# Altium PCB PCB1.PcbDoc
Units mm, origin at the board's own origin, x right, y up, seen from the top; angles counter-clockwise.
Board outline 90.25 x 90.21 mm, 2 copper layers (Top Layer, Bottom Layer); 9 components, 86 nets, 163 pads, 37 vias.
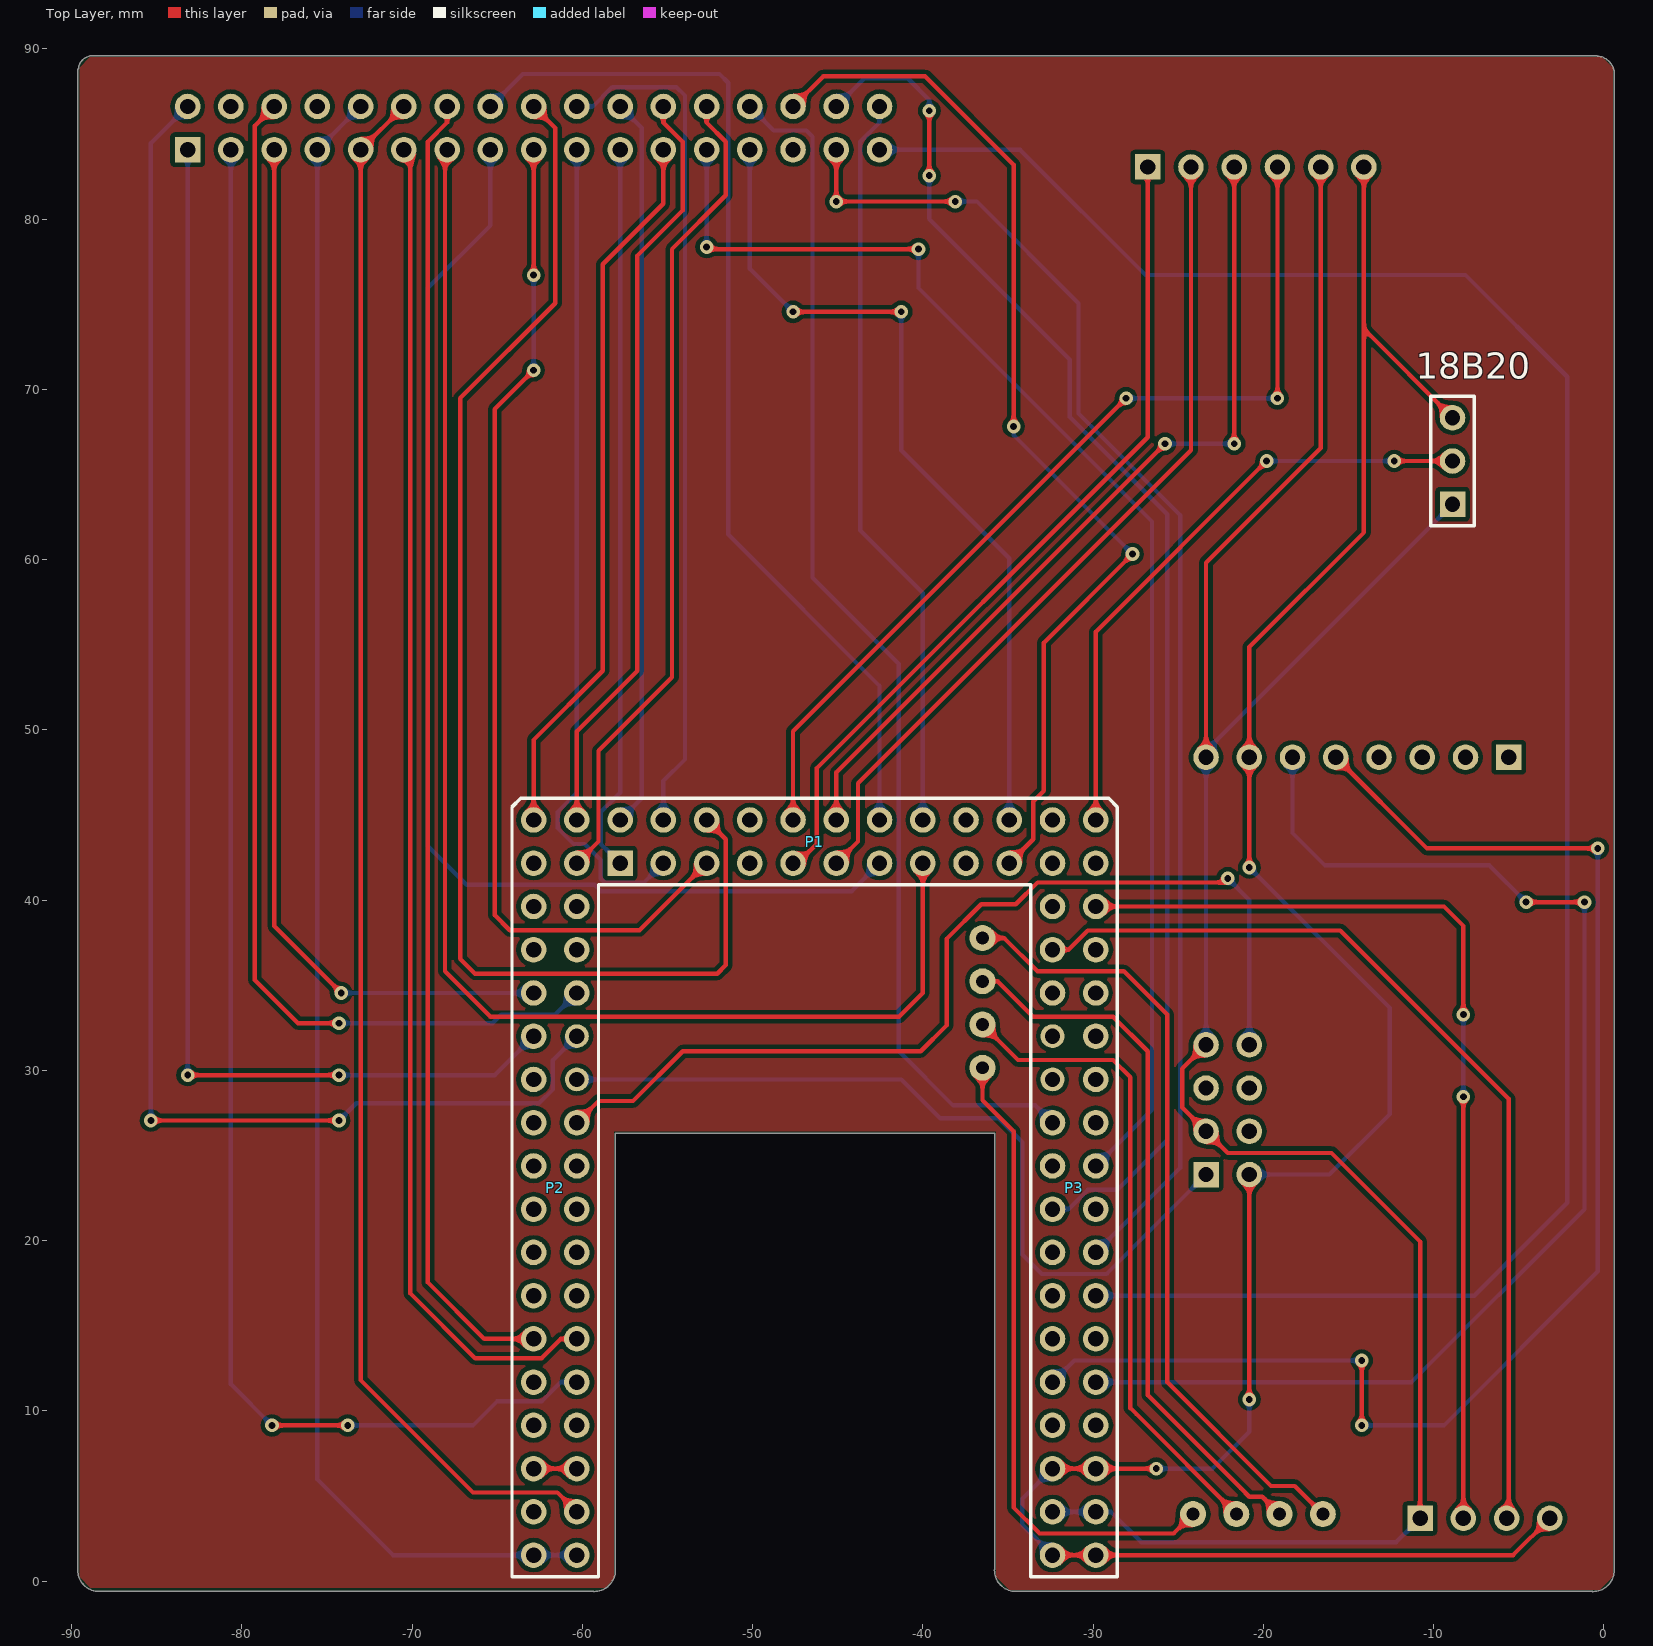
[diagram p0: Top Layer view]
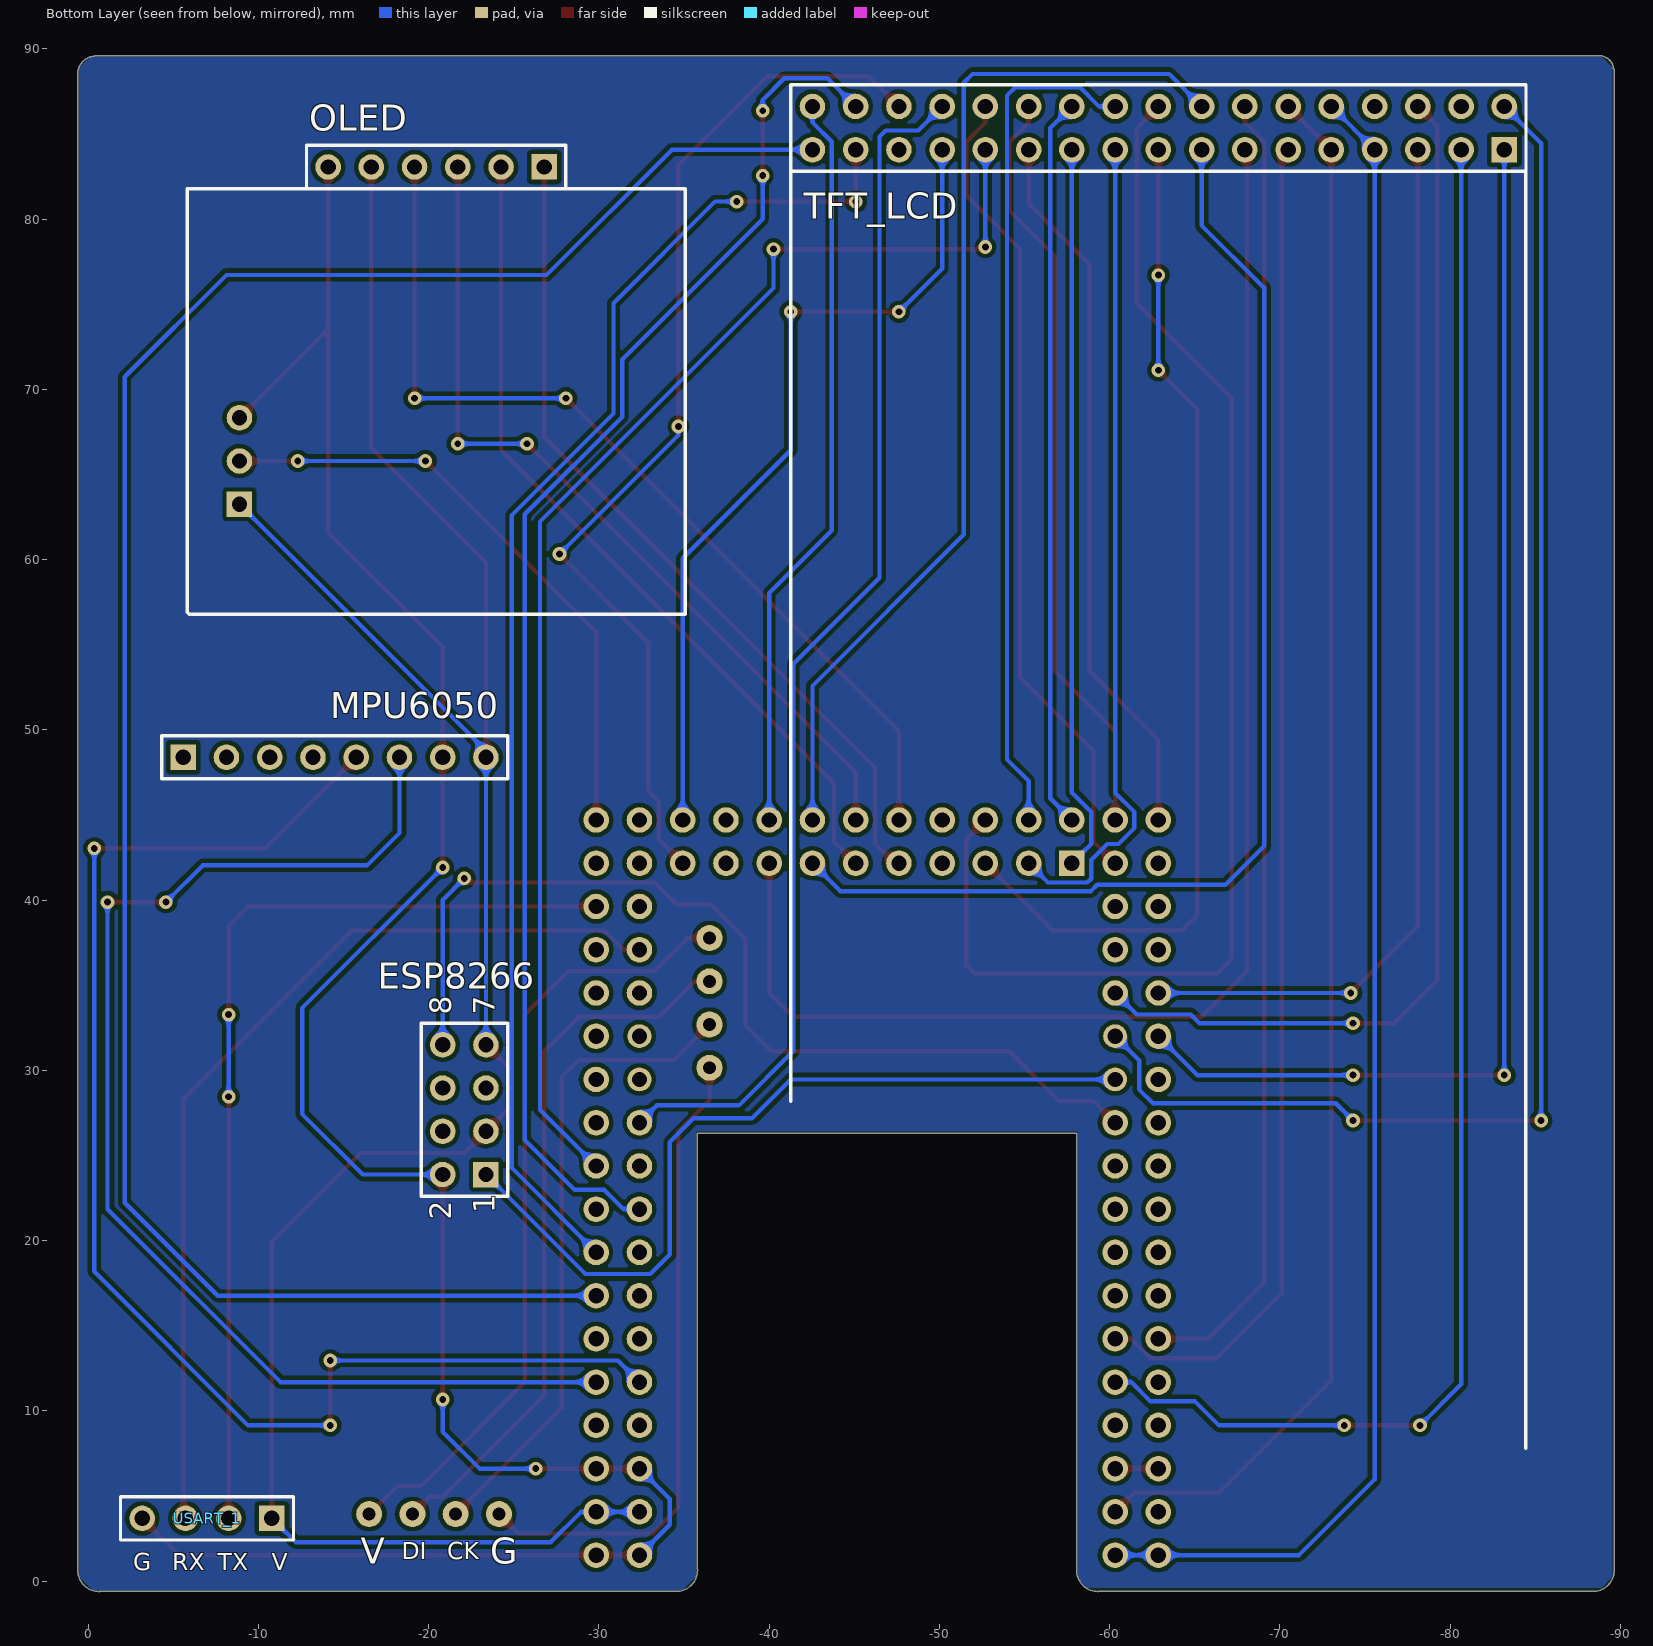
[diagram p1: Bottom Layer view, seen from below]

## Layer stack, top to bottom
Top Solder: solder mask 0.0102, Solder Resist, Dk 3.5
Top Layer: signal copper 0.0356
Dielectric 1: dielectric 0.32, FR-4, Dk 4.8
Bottom Layer: signal copper 0.0356
Bottom Solder: solder mask 0.0102, Solder Resist, Dk 3.5

## Board outline
-88.392,-0.61 -59.353,-0.61 ccw(c-59.316,-0.515) -59.316,-0.617 ccw(c-59.316,0.635) -58.064,0.63 ccw(c-58.166,0.635) -58.064,0.635 -58.064,26.314 -35.789,26.314 -35.789,0.679 ccw(c-35.694,0.642) -35.796,0.642 ccw(c-34.544,0.642) -34.549,-0.61 ccw(c-34.544,-0.508) -34.544,-0.61 -0.679,-0.61 ccw(c-0.642,-0.515) -0.642,-0.617 ccw(c-0.642,0.635) 0.61,0.63 ccw(c0.508,0.635) 0.61,0.635 0.61,88.519 ccw(c0.508,88.519) 0.61,88.524 ccw(c-0.444,88.519) -0.38,89.571 ccw(c-0.444,89.492) -0.444,89.594 -88.767,89.594 ccw(c-88.767,89.492) -88.772,89.594 ccw(c-88.767,88.762) -89.596,88.844 ccw(c-89.535,88.762) -89.637,88.762 -89.637,0.679 ccw(c-89.542,0.642) -89.644,0.642 ccw(c-88.392,0.642) -88.397,-0.61 ccw(c-88.392,-0.508)

## Design rules (kind name [scope] priority, off if disabled: settings)
Clearance Clearance_1 [All] p1: gap=0.254 ignorepadtopadclearanceinfootprint=FALSE except(0: Arc-Hole Track-Hole SMDPad-Hole THPad-Hole Via-Hole Fill-Hole Poly-Hole Region-Hole Text-Hole)
Clearance [All] p2: gap=0.254 ignorepadtopadclearanceinfootprint=FALSE except(0: Arc-Hole Track-Hole SMDPad-Hole THPad-Hole Via-Hole Fill-Hole Poly-Hole Region-Hole Text-Hole)
ComponentClearance [All] p1 off: gap=0.254 collisioncheckmode=3 verticalgap=0.254 showdistances=FALSE
PlaneClearance [All] p1: clearance=0.254
PolygonConnect [All] p1: connectstyle=Relief reliefconductorwidth=0.254 reliefentries=4 polygonreliefangle="90 Angle" airgapwidth=0.254
RoutingVias [All] p1: holewidth=0.4 width=0.8 viastyle="Through Hole" minholewidth=0.4 minwidth=0.8 maxholewidth=0.4 maxwidth=0.8
SolderMaskExpansion [All] p1: expansion=0.102 istentingtop=FALSE
Width [All] p1: maxlimit=0.254 minlimit=0.254 preferedwidth=0.254
28 further rules are at their usual default settings.

## Components (designator, comment, footprint, x,y, rotation, side; value= is the part's Value field where it differs from the comment)
18B20 "Header 3" HDR1X3 -8.89,63.246 r90 top
ESP8266 "Header 4X2" HDR2X4 -23.368,23.876 r90 bottom
MPU6050 "Header 8" HDR1X8 -5.588,48.387 r180 bottom
OLED "Header 6" HDR1X6 -26.797,83.058 r0 bottom
P1 "Header 10X2" HDR2X10 -46.355,43.434 r0 top
P2 "Header 18X2" HDR2X18#1 -61.595,23.114 r270 top
P3 "Header 18X2" HDR2X18#2 -31.115,23.114 r270 top
TFT_LCD "Header 17X2" HDR2X17 -83.185,84.074 r0 bottom
USART_1 "Header 4" HDR1X4 -10.795,3.683 r0 bottom

## Footprints (in the part's own frame and the unit in brackets; to place one, negate y for a bottom-side part, rotate by r counter-clockwise, add the part's x,y. Pads: shape width x height; smd on the part's side, far side on the other; paste and mask are expansions set on the pad)
HDR1X3 [mm] "Connector; Header; 3 Position"
  rect 1.5x1.5 hole 0.9: 1(0,0)
  round 1.5 hole 0.9: 2(2.54,0) 3(5.08,0)
  silkscreen extent -1.27,-1.27 6.35,1.27
HDR1X4 [mm] "Connector; Header; 4 Position"
  rect 1.5x1.5 hole 0.9: 1(0,0)
  round 1.5 hole 0.9: 2(2.54,0) 3(5.08,0) 4(7.62,0)
  silkscreen extent -1.27,-1.27 8.89,1.27
HDR1X6 [mm] "Connector; Header; 6 Position"
  rect 1.5x1.5 hole 0.9: 1(0,0)
  round 1.5 hole 0.9: 2(2.54,0) 3(5.08,0) 4(7.62,0) 5(10.16,0) 6(12.7,0)
  silkscreen extent -1.27,-1.27 13.97,1.27
HDR1X8 [mm] "Connector; Header; 8 Position"
  rect 1.5x1.5 hole 0.9: 1(0,0)
  round 1.5 hole 0.9: 2(2.54,0) 3(5.08,0) 4(7.62,0) 5(10.16,0) 6(12.7,0) 7(15.24,0) 8(17.78,0)
  silkscreen extent -1.27,-1.27 19.05,1.27
HDR2X4 [mm] "Connector; Header; 4x2 Position"
  rect 1.5x1.5 hole 0.9: 1(0,0)
  round 1.5 hole 0.9: 2(0,2.54) 3(2.54,0) 4(2.54,2.54) 5(5.08,0) 6(5.08,2.54) 7(7.62,0) 8(7.62,2.54)
  silkscreen extent -1.27,-1.27 8.89,3.81
HDR2X10 [mm]
  rect 1.5x1.5 hole 0.9: 1(-11.43,-1.27)
  round 1.5 hole 0.9: 2(-11.43,1.27) 3(-8.89,-1.27) 4(-8.89,1.27) 5(-6.35,-1.27) 6(-6.35,1.27) 7(-3.81,-1.27) 8(-3.81,1.27) 9(-1.27,-1.27) 10(-1.27,1.27) 11(1.27,-1.27) 12(1.27,1.27) 13(3.81,-1.27) 14(3.81,1.27) 15(6.35,-1.27) 16(6.35,1.27) 17(8.89,-1.27) 18(8.89,1.27) 19(11.43,-1.27) 20(11.43,1.27)
  silkscreen extent -12.7,2.54 12.7,2.54
HDR2X17 [mm] "Connector; Header; 17x2 Position"
  rect 1.5x1.5 hole 0.9: 1(0,0)
  round 1.5 hole 0.9: 2(0,-2.54) 3(2.54,0) 4(2.54,-2.54) 5(5.08,0) 6(5.08,-2.54) 7(7.62,0) 8(7.62,-2.54) 9(10.16,0) 10(10.16,-2.54) 11(12.7,0) 12(12.7,-2.54) 13(15.24,0) 14(15.24,-2.54) 15(17.78,0) 16(17.78,-2.54) 17(20.32,0) 18(20.32,-2.54) 19(22.86,0) 20(22.86,-2.54) 21(25.4,0) 22(25.4,-2.54) 23(27.94,0) 24(27.94,-2.54) 25(30.48,0) 26(30.48,-2.54) 27(33.02,0) 28(33.02,-2.54) 29(35.56,0) 30(35.56,-2.54) 31(38.1,0) 32(38.1,-2.54) 33(40.64,0) 34(40.64,-2.54)
  silkscreen extent -1.27,-3.81 41.91,1.27
HDR2X18#1 [mm]
  round 1.5 hole 0.9: 1(-21.59,-1.27) 2(-21.59,1.27) 3(-19.05,-1.27) 4(-19.05,1.27) 5(-16.51,-1.27) 6(-16.51,1.27) 7(-13.97,-1.27) 8(-13.97,1.27) 9(-11.43,-1.27) 10(-11.43,1.27) 11(-8.89,-1.27) 13(-6.35,-1.27) 15(-3.81,-1.27) 16(-3.81,1.27) 17(-1.27,-1.27) 18(-1.27,1.27) 19(1.27,-1.27) 20(1.27,1.27) 21(3.81,-1.27) 22(3.81,1.27) 23(6.35,-1.27) 24(6.35,1.27) 25(8.89,-1.27) 26(8.89,1.27) 27(11.43,-1.27) 28(11.43,1.27) 29(13.97,-1.27) 30(13.97,1.27) 31(16.51,-1.27) 32(16.51,1.27) 33(19.05,-1.27) 34(19.05,1.27) 35(21.59,-1.27) 36(21.59,1.27)
  round 1.4 hole 0.9: 12(-8.89,1.27) 14(-6.35,1.27)
  silkscreen extent -22.86,-2.54 22.86,2.54
HDR2X18#2 [mm]
  round 1.5 hole 0.9: 1(-21.59,1.27) 2(-21.59,-1.27) 3(-19.05,1.27) 4(-19.05,-1.27) 5(-16.51,1.27) 6(-16.51,-1.27) 7(-13.97,1.27) 8(-13.97,-1.27) 9(-11.43,1.27) 10(-11.43,-1.27) 11(-8.89,1.27) 13(-6.35,1.27) 15(-3.81,1.27) 16(-3.81,-1.27) 17(-1.27,1.27) 18(-1.27,-1.27) 19(1.27,1.27) 20(1.27,-1.27) 21(3.81,1.27) 22(3.81,-1.27) 23(6.35,1.27) 24(6.35,-1.27) 25(8.89,1.27) 26(8.89,-1.27) 27(11.43,1.27) 28(11.43,-1.27) 29(13.97,1.27) 30(13.97,-1.27) 31(16.51,1.27) 32(16.51,-1.27) 33(19.05,1.27) 34(19.05,-1.27) 35(21.59,1.27) 36(21.59,-1.27)
  round 1.4 hole 0.9: 12(-8.89,-1.27) 14(-6.35,-1.27)
  silkscreen extent -22.86,-2.54 22.86,2.54

## Part data
18B20: "Header, 3-Pin", LatestRevisionDate=17-Jul-2002, LatestRevisionNote="Re-released for DXP Platform.", Publisher="Altium Limited"
ESP8266: "Header, 4-Pin, Dual row", LatestRevisionDate=17-Jul-2002, LatestRevisionNote="Re-released for DXP Platform.", Publisher="Altium Limited"
MPU6050: "Header, 8-Pin", LatestRevisionDate=17-Jul-2002, LatestRevisionNote="Re-released for DXP Platform.", Publisher="Altium Limited"
OLED: "Header, 6-Pin", LatestRevisionDate=17-Jul-2002, LatestRevisionNote="Re-released for DXP Platform.", Publisher="Altium Limited"
P1: "Header, 10-Pin, Dual row", LatestRevisionDate=17-Jul-2002, LatestRevisionNote="Re-released for DXP Platform.", Publisher="Altium Limited"
P2 P3: "Header, 18-Pin, Dual row", LatestRevisionDate=17-Jul-2002, LatestRevisionNote="Re-released for DXP Platform.", Publisher="Altium Limited"
TFT_LCD: "Header, 17-Pin, Dual row", LatestRevisionDate=17-Jul-2002, LatestRevisionNote="Re-released for DXP Platform.", Publisher="Altium Limited"
USART_1: "Header, 4-Pin", LatestRevisionDate=17-Jul-2002, LatestRevisionNote="Re-released for DXP Platform.", Publisher="Altium Limited"

## Free pads (board coordinates)
  round 1.524 hole 0.762: 3(-36.5,37.77) 5(-36.5,35.23) 5(-24.13,3.937) 5(-21.59,3.937) 6(-36.5,32.69) 6(-19.05,3.937) 7(-36.5,30.15) 7(-16.51,3.937)

## Via types
v1: diameter 0.8, hole 0.4, Top Layer to Bottom Layer, 37 vias

## Nets (pads, with @x,y where several pads share a name; then routed paths per layer and width w, separated by ;. In a path a pad name is that pad's centre, name@x,y a point inside that pad or via, vN(x,y) a via of type N, cw(c..) or ccw(c..) an arc to the next point about the centre after c; other vN are vias at no path point)
3V3_1: P2.34 TFT_LCD.9 TFT_LCD.12 | length 91.8
  Top Layer w0.254: TFT_LCD.12 TFT_LCD.9 -73.025,11.811 -66.421,5.207 -61.468,5.207 P2.34
3V3_2: 18B20.1 ESP8266.3 ESP8266.7 MPU6050.8 OLED.5 P3.33 P3.34 USART_1.1 | length 135.9
  Top Layer w0.254: ESP8266.7 -24.765,30.099 -24.765,27.813 ESP8266.3 -22.098,25.146 -16.002,25.146 -10.795,19.939 USART_1.1 ; MPU6050.8 -23.368,59.817 -16.637,66.548 OLED.5
  Bottom Layer w0.254: P3.34 P3.33 -28.956,4.064 -27.178,2.286 -12.192,2.286 USART_1.1 ; ESP8266.7 MPU6050.8 -23.368,48.768 18B20.1
5V: P2.31 P2.32 | length 2.5
  Top Layer w0.254: P2.31 P2.32
GND_1: P2.35 P2.36 TFT_LCD.7 TFT_LCD.10 | length 98.8
  Bottom Layer w0.254: TFT_LCD.10 TFT_LCD.7 -75.565,5.969 -71.12,1.524 P2.35 P2.36
GND_2: 18B20.3 ESP8266.2 MPU6050.7 OLED.6 P3.31 P3.32 P3.35 P3.36 USART_1.4 | length 143.1
  Top Layer w0.254: P3.36 P3.35 -5.334,1.524 USART_1.4 ; P3.32 P3.31 v1(-26.289,6.604) ; v1(-20.828,10.668) ESP8266.2 ; v1(-20.828,41.91) MPU6050.7 -20.828,54.864 -14.097,61.595 -14.097,73.533 ; OLED.6 -14.097,73.533 ; 18B20.3 -14.097,73.533
  Bottom Layer w0.254: P3.36 -34.163,3.302 -34.163,4.826 P3.32 ; v1(-26.289,6.604) -22.987,6.604 -20.828,8.763 v1(-20.828,10.668) ; ESP8266.2 -16.129,23.876 -12.573,27.432 -12.573,33.655 v1(-20.828,41.91)
PA_0: P2.15
PA_1: P2.13
PA_2: ESP8266.8 P2.16 | length 57.5
  Top Layer w0.254: P2.16 -59.055,28.194 -57.023,28.194 -54.102,31.115 -40.132,31.115 -38.608,32.639 -38.608,37.719 -36.576,39.751 -34.544,39.751 -33.262,41.033 -22.34,41.033 v1(-22.098,41.275)
  Bottom Layer w0.254: v1(-22.098,41.275) -20.828,40.005 ESP8266.8
PA_3: ESP8266.1 P2.14 | length 48
  Bottom Layer w0.254: P2.14 -41.275,29.464 -38.989,27.178 -35.56,27.178 -34.163,25.781 -34.163,19.177 -33.02,18.034 -29.21,18.034 ESP8266.1
PA_4: P2.11 TFT_LCD.1 | length 75.6
  Top Layer w0.254: v1(-83.185,29.718) v1(-74.295,29.718)
  Bottom Layer w0.254: v1(-83.185,29.718) TFT_LCD.1 ; v1(-74.295,29.718) -65.151,29.718 P2.11
PA_5: P2.12 TFT_LCD.2 | length 88.5
  Top Layer w0.254: v1(-85.344,27.051) v1(-74.295,27.051)
  Bottom Layer w0.254: v1(-85.344,27.051) -85.344,84.455 TFT_LCD.2 ; v1(-74.295,27.051) -73.279,28.067 -62.548,28.067 -61.734,28.881 -61.734,30.595 P2.12
PA_6: P2.9 TFT_LCD.5 | length 62.5
  Top Layer w0.254: TFT_LCD.5 -78.105,38.481 v1(-74.168,34.544)
  Bottom Layer w0.254: v1(-74.168,34.544) P2.9
PA_7: P2.10 TFT_LCD.6 | length 72.5
  Top Layer w0.254: TFT_LCD.6 -79.248,85.471 -79.248,35.306 -76.708,32.766 v1(-74.295,32.766)
  Bottom Layer w0.254: v1(-74.295,32.766) -65.278,32.766 -64.77,33.274 -61.595,33.274 P2.10
PA_8: P3.6
PA_9: P3.5 USART_1.2 | length 56.9
  Top Layer w0.254: P3.5 -9.398,39.624 -8.255,38.481 v1(-8.255,33.274) ; USART_1.2 v1(-8.255,28.448)
  Bottom Layer w0.254: v1(-8.255,28.448) v1(-8.255,33.274)
PA_10: P3.8 USART_1.3 | length 56.1
  Top Layer w0.254: P3.8 -31.444,37.084 -30.313,38.215 -15.482,38.215 -5.588,28.321 -5.588,3.81 USART_1.3
PA_11: P3.7
PA_12: P3.10
PA_13: P3.9
PA_14: P3.12
PA_15: P3.11
PB_0: P2.5
PB_1: P2.6
PB_2: P2.3
PB_3: P3.24
PB_4: P3.25
PB_5: P3.26
PB_6: MPU6050.6 P3.27 | length 74.2
  Top Layer w0.254: v1(-4.572,39.878) v1(-1.143,39.878)
  Bottom Layer w0.254: P3.27 -11.303,11.684 -1.143,21.844 v1(-1.143,39.878) ; MPU6050.6 -18.288,43.942 -16.383,42.037 -6.731,42.037 v1(-4.572,39.878)
PB_7: MPU6050.5 P3.28 | length 82.6
  Top Layer w0.254: MPU6050.5 -10.395,43.034 v1(-0.362,43.034) ; v1(-14.224,9.144) v1(-14.224,12.954)
  Bottom Layer w0.254: P3.28 -31.115,12.954 v1(-14.224,12.954) ; v1(-14.224,9.144) -9.398,9.144 -0.362,18.18 v1(-0.362,43.034)
PB_8: P3.29
PB_9: P3.30
PB_10: P1.7
PB_11: P1.8
PB_12: OLED.1 P1.9 | length 49.7
  Top Layer w0.254: P1.9 -47.371,42.164 -46.228,43.307 -46.228,47.752 -26.797,67.183 OLED.1
PB_13: OLED.4 P1.10 | length 55.3
  Top Layer w0.254: P1.10 -47.625,49.911 v1(-28.067,69.469) ; v1(-19.177,69.469) OLED.4
  Bottom Layer w0.254: v1(-28.067,69.469) v1(-19.177,69.469)
PB_14: OLED.2 P1.11 | length 49.5
  Top Layer w0.254: P1.11 -43.815,43.434 -43.815,46.863 -24.257,66.421 OLED.2
PB_15: OLED.3 P1.12 | length 50.4
  Top Layer w0.254: P1.12 -45.085,47.498 v1(-25.781,66.802) ; v1(-21.717,66.802) OLED.3
  Bottom Layer w0.254: v1(-25.781,66.802) v1(-21.717,66.802)
PC_0: P2.19
PC_1: P2.20
PC_2: P2.17
PC_3: P2.18
PC_4: P2.7
PC_5: P2.8
PC_6: P3.2
PC_7: P3.4
PC_8: 18B20.2 P3.1 | length 36.2
  Top Layer w0.254: P3.1 -29.845,55.753 v1(-19.812,65.786) ; v1(-12.319,65.786) 18B20.2
  Bottom Layer w0.254: v1(-19.812,65.786) v1(-12.319,65.786)
PC_9: P3.3
PC_10: P3.14
PC_11: P3.13
PC_12: P3.15
PC_13: P2.24
PC_14: P2.21
PC_15: P2.22
PD_0: P3.16 TFT_LCD.28 | length 71
  Bottom Layer w0.254: TFT_LCD.28 -48.756,85.205 -46.851,85.205 -46.482,84.836 -46.482,58.928 -41.414,53.86 -41.414,31.127 -38.227,27.94 -33.401,27.94 P3.16
PD_1: P3.17 TFT_LCD.25 | length 79.1
  Top Layer w0.254: v1(-52.705,78.359) -52.578,78.232 v1(-40.259,78.232)
  Bottom Layer w0.254: v1(-52.705,78.359) TFT_LCD.25 ; v1(-40.259,78.232) -40.259,75.946 -26.543,62.23 -26.543,27.686 P3.17
PD_2: P3.18
PD_3: P3.19
PD_4: P3.20 TFT_LCD.32 | length 82
  Top Layer w0.254: v1(-39.624,82.55) v1(-39.624,86.36)
  Bottom Layer w0.254: TFT_LCD.32 -43.434,88.265 -40.894,88.265 -39.624,86.995 v1(-39.624,86.36) ; v1(-39.624,82.55) -39.624,80.01 -31.369,71.755 -31.369,68.37 -25.654,62.655 -25.654,25.908 -28.587,22.975 -30.313,22.975 -31.444,21.844 P3.20
PD_5: P3.21 TFT_LCD.31 | length 80
  Top Layer w0.254: TFT_LCD.31 v1(-45.085,81.026) v1(-38.1,81.026)
  Bottom Layer w0.254: v1(-38.1,81.026) -36.83,81.026 -30.861,75.057 -30.861,68.58 -24.892,62.611 -24.892,24.257 P3.21
PD_6: P3.22
PD_7: P3.23 TFT_LCD.33 | length 124.4
  Bottom Layer w0.254: TFT_LCD.33 -34.29,84.074 -26.924,76.708 -8.128,76.708 -2.159,70.739 -2.159,22.225 -7.62,16.764 P3.23
PD_8: P1.13 TFT_LCD.15 | length 70.7
  Bottom Layer w0.254: TFT_LCD.15 -65.405,79.629 -69.088,75.946 -69.088,43.18 -66.802,40.894 -59.272,40.894 -58.903,40.525 -44.184,40.525 P1.13
PD_9: P1.14 TFT_LCD.16 | length 62
  Bottom Layer w0.254: TFT_LCD.16 -63.5,88.519 -51.943,88.519 -51.435,88.011 -51.435,61.468 -42.545,52.578 P1.14
PD_10: P1.15 TFT_LCD.13 | length 85.7
  Top Layer w0.254: TFT_LCD.13 -68.072,83.947 -68.072,35.814 -65.405,33.147 -41.402,33.147 -40.005,34.544 P1.15
PD_11: P1.16 TFT_LCD.34 | length 43.9
  Bottom Layer w0.254: TFT_LCD.34 -42.545,85.673 -43.676,84.542 -43.676,61.71 -40.005,58.039 P1.16
PD_12: P1.17
PD_13: P1.18
PD_14: P1.19 TFT_LCD.30 | length 62.8
  Top Layer w0.254: TFT_LCD.30 -45.847,88.392 -39.878,88.392 -34.671,83.185 v1(-34.671,67.818) ; P1.19 -33.516,43.573 -33.516,45.795 -32.893,46.418 -32.893,55.118 v1(-27.686,60.325)
  Bottom Layer w0.254: v1(-34.671,67.818) -34.671,67.31 v1(-27.686,60.325)
PD_15: P1.20 TFT_LCD.27 | length 49.4
  Top Layer w0.254: v1(-47.625,74.549) v1(-41.275,74.549)
  Bottom Layer w0.254: TFT_LCD.27 -50.165,77.089 v1(-47.625,74.549) ; v1(-41.275,74.549) -41.275,66.421 -34.925,60.071 P1.20
PE_0: P2.29
PE_1: P2.30
PE_2: P2.27
PE_3: P2.28 TFT_LCD.3 | length 94.9
  Top Layer w0.254: v1(-78.232,9.144) v1(-73.787,9.144)
  Bottom Layer w0.254: TFT_LCD.3 -80.645,11.557 v1(-78.232,9.144) ; v1(-73.787,9.144) -66.421,9.144 -65.012,10.553 -62.397,10.553 -61.266,11.684 P2.28
PE_4: P2.25 TFT_LCD.14 | length 77.1
  Top Layer w0.254: TFT_LCD.14 -67.945,85.673 -69.076,84.542 -69.076,17.538 -65.762,14.224 P2.25
PE_5: P2.26 TFT_LCD.11 | length 79.2
  Top Layer w0.254: TFT_LCD.11 -70.104,83.693 -70.104,16.891 -66.294,13.081 -64.008,13.081 -63.996,13.093 -62.397,13.093 -61.266,14.224 P2.26
PE_6: P2.23
PE_7: P2.4 TFT_LCD.26 | length 48.5
  Top Layer w0.254: P2.4 -59.055,43.434 -59.055,48.768 -54.737,53.086 -54.737,78.232 -51.574,81.395 -51.574,84.542 -52.705,85.673 TFT_LCD.26
PE_8: P2.1 TFT_LCD.23 | length 42.5
  Top Layer w0.254: P2.1 -62.865,49.403 -58.801,53.467 -58.801,77.343 -55.245,80.899 TFT_LCD.23
PE_9: P2.2 TFT_LCD.24 | length 45
  Top Layer w0.254: P2.2 -60.325,49.911 -56.769,53.467 -56.769,77.851 -54.114,80.506 -54.114,84.542 -55.245,85.673 TFT_LCD.24
PE_10: P1.1 TFT_LCD.21 | length 42.8
  Bottom Layer w0.254: P1.1 -58.916,43.295 -58.916,45.172 -57.785,46.303 TFT_LCD.21
PE_11: P1.2 TFT_LCD.22 | length 43
  Bottom Layer w0.254: P1.2 -56.515,45.974 -56.515,85.344 TFT_LCD.22
PE_12: P1.3 TFT_LCD.19 | length 49
  Bottom Layer w0.254: TFT_LCD.19 -60.325,46.303 -61.456,45.172 -61.456,44.236 -60.515,43.295 -59.857,43.295 -58.916,42.354 -58.916,41.256 -58.693,41.033 -56.376,41.033 P1.3
PE_13: P1.4 TFT_LCD.20 | length 50.1
  Bottom Layer w0.254: TFT_LCD.20 -59.384,86.614 -58.253,87.745 -54.471,87.745 -53.975,87.249 -53.975,48.26 -55.245,46.99 P1.4
PE_14: P1.5 TFT_LCD.17 | length 60.3
  Top Layer w0.254: v1(-62.865,71.12) -65.151,68.834 -65.151,39.116 -64.262,38.227 -56.642,38.227 P1.5 ; v1(-62.865,76.708) TFT_LCD.17
  Bottom Layer w0.254: v1(-62.865,71.12) v1(-62.865,76.708)
PE_15: P1.6 TFT_LCD.18 | length 78.1
  Top Layer w0.254: TFT_LCD.18 -61.595,85.344 -61.595,75.057 -67.183,69.469 -67.183,36.552 -66.306,35.675 -52.082,35.675 -51.574,36.183 -51.574,43.573 P1.6
VB: P2.33
pads on no net: ESP8266.4 ESP8266.5 ESP8266.6 MPU6050.1 MPU6050.2 MPU6050.3 MPU6050.4 TFT_LCD.4 TFT_LCD.8 TFT_LCD.29
copper on no net: | length 165
  Top Layer w0.254: -36.5,30.15 -36.5,28.245 -35.179,26.924 -34.671,26.416 -34.671,4.318 -33.274,2.921 -33.147,2.794 -25.273,2.794 -24.384,3.683 ; -36.5,32.69 -34.417,30.607 -28.829,30.607 -27.813,29.591 -27.813,10.287 -27.813,10.16 -27.432,9.779 -21.59,3.937 ; -36.5,35.23 -35.611,35.23 -33.528,33.147 -28.829,33.147 -26.797,31.115 -26.797,10.922 -21.336,5.461 -20.828,4.953 -20.066,4.953 -19.05,3.937 ; -36.5,37.77 -35.23,37.77 -33.274,35.814 -28.194,35.814 -25.654,33.274 -25.654,11.684 -19.558,5.588 -18.161,5.588 -17.228,4.655 -17.165,4.592 -16.784,4.211 -16.51,3.937

## Polygon pours and split planes (outlines as drawn)
no net on Top Layer "Mechanical 1-No Net" (solid, pour order 2): -89.535,88.9 -88.943,89.492 -0.084,89.492 0.508,88.9 0.508,0.254 -0.254,-0.508 -34.925,-0.508 -35.687,0.254 -35.687,26.416 -58.166,26.416 -58.166,0.127 -58.674,-0.381 -88.9,-0.381 -89.535,0.254
no net on Bottom Layer "Bottom Layer-No Net" (solid, pour order 8): -89.535,88.9 -88.943,89.492 -0.084,89.492 0.508,88.9 0.508,0.254 -0.254,-0.508 -34.925,-0.508 -35.687,0.254 -35.687,26.416 -58.166,26.416 -58.166,0.127 -58.674,-0.381 -88.9,-0.381 -89.535,0.254

## Silkscreen, mask and mechanical layers (free items; w line width, h text height)
Top Overlay:
  lines w0.203: -64.135,44.704 -64.135,45.466 -63.627,45.974 -62.865,45.974 ; -59.055,40.894 -57.15,40.894 -33.655,40.894 ; -29.845,45.974 -29.083,45.974 -28.575,45.466 -28.575,44.704
Bottom Overlay:
  lines w0.203: -84.447,7.804 -84.447,82.804 ; -41.275,28.194 -41.275,30.48 -41.275,82.804 ; -28.067,81.788 -35.067,81.788 -35.067,56.784 -35.063,56.788 -25.635,56.788 -12.827,56.788 -5.95,56.788 -5.827,56.911 -5.827,81.788 -12.827,81.788
  text "CK" at -21.082,1.27 h1
  text "DI" at -18.415,1.27 h1
  text "G" at -23.622,1.016 h1.52
  text "V" at -16.002,1.016 h1.52
  text "V" at -10.795,0.635 h1
  text "TX" at -7.62,0.635 h1
  text "RX" at -4.953,0.635 h1
  text "G" at -2.667,0.635 h1
Mechanical 1:
  lines w0.203: -89.542,0.642 ccw(c-88.392,0.642) -88.392,-0.508 -59.309,-0.508 ; -89.535,0.635 -89.535,88.762 ; -89.498,88.762 cw(c-88.767,88.762) -88.767,89.492 -0.444,89.492 ; -59.316,-0.515 ccw(c-59.316,0.635) -58.166,0.635 -58.166,26.416 -35.687,26.416 -35.687,0.635 ; -35.694,0.642 ccw(c-34.544,0.642) -34.544,-0.508 -22.035,-0.508 -0.635,-0.508 ; -0.642,-0.515 ccw(c-0.642,0.635) 0.508,0.635 0.508,12.636 0.508,17.653 0.508,38.925 0.508,46.355 0.508,46.99 0.508,88.519 ccw(c-0.444,88.519) -0.444,89.471

## Text inside footprints (layer, text, board x,y; h text height)
ESP8266: Bottom Overlay "8" at -21.336,33.274 h1.27 r270; Bottom Overlay "7" at -23.876,33.274 h1.27 r270; Bottom Overlay "1" at -23.876,21.59 h1.27 r270; Bottom Overlay "2" at -21.336,21.209 h1.27 r270